# Altium PCB Some.PcbDoc
Units mil, origin at the board's own origin, x right, y up, seen from the top; angles counter-clockwise.
Board outline 1050 x 1745 mil, 2 copper layers (Top Layer, Bottom Layer); 10 components, 8 nets, 36 pads, 0 vias.
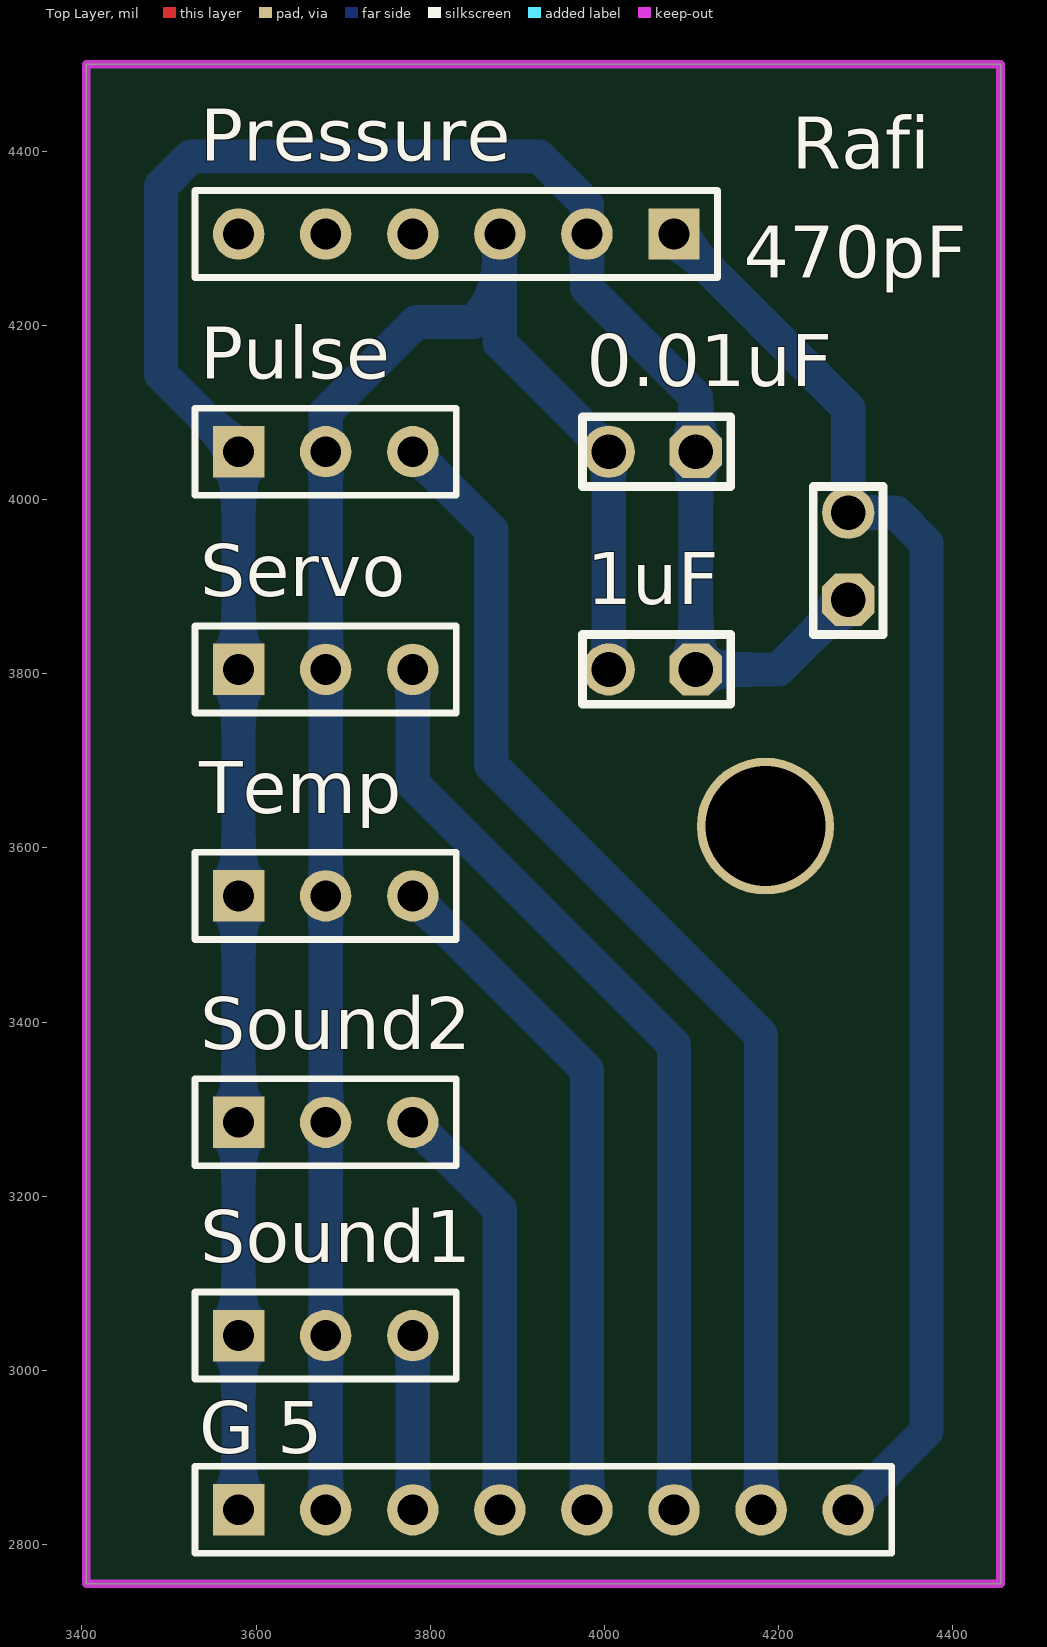
[diagram p0: Top Layer view]
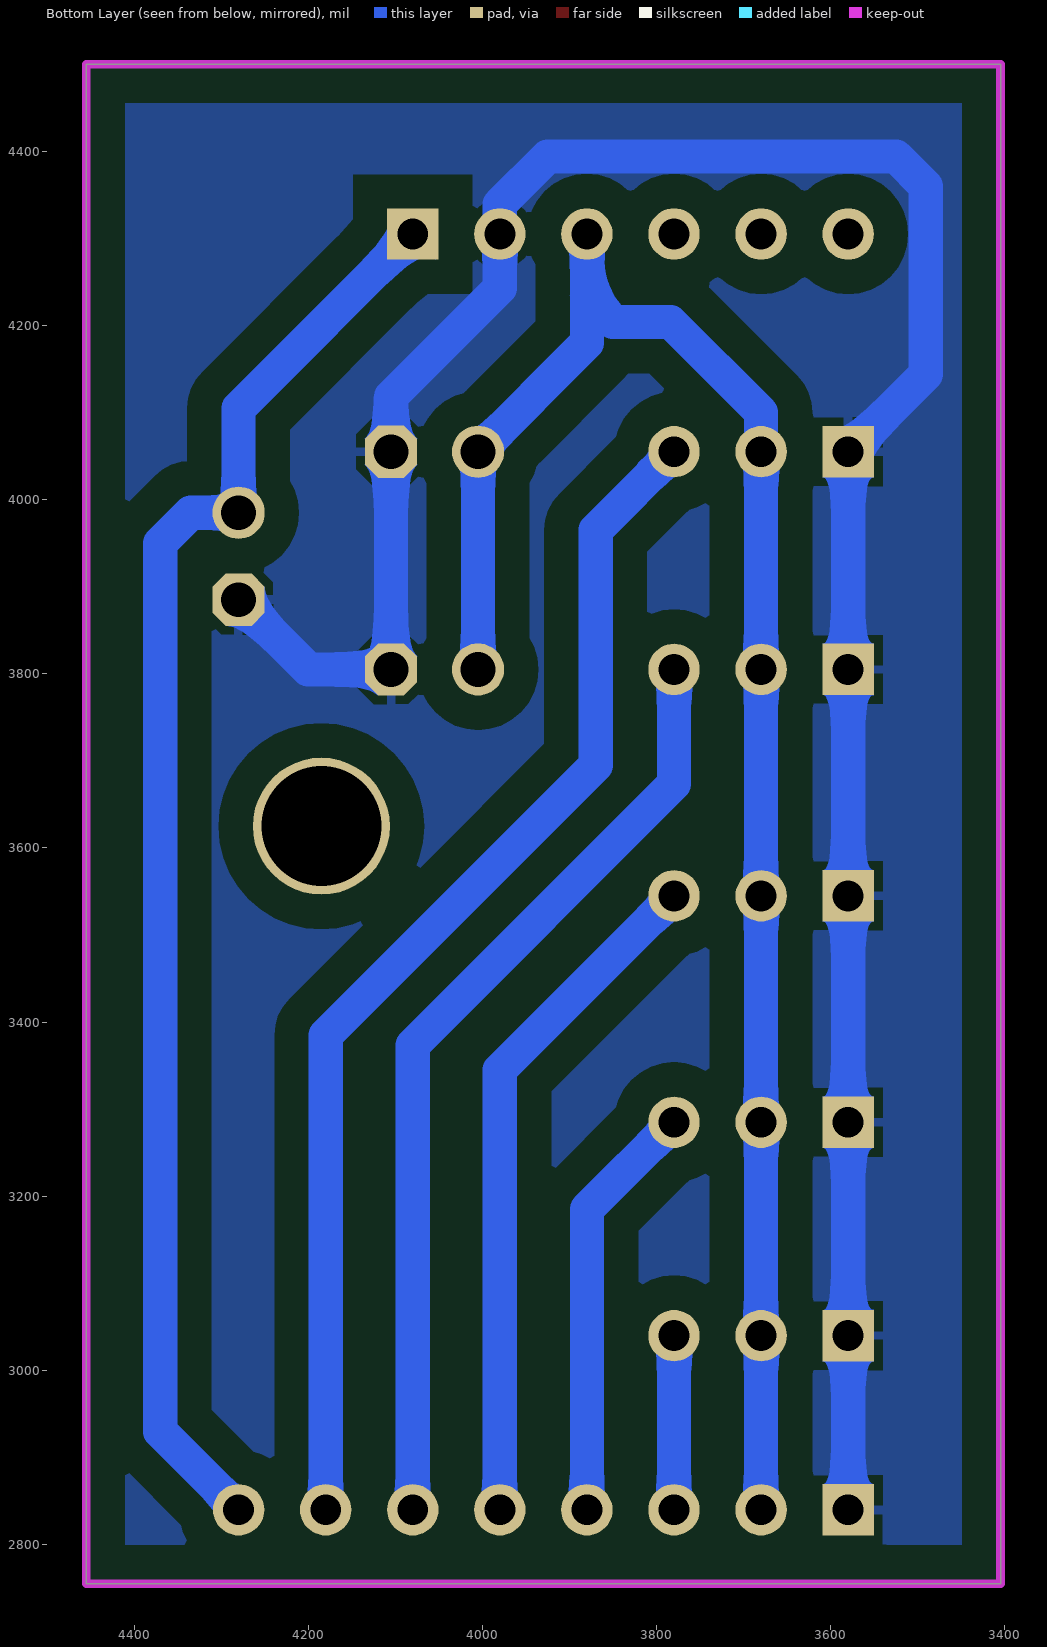
[diagram p1: Bottom Layer view, seen from below]

## Layer stack, top to bottom
Top Solder: solder mask 0.4, Solder Resist, Dk 3.5
Top Layer: signal copper 1.4
Dielectric 1: dielectric 12.6, FR-4, Dk 4.8
Bottom Layer: signal copper 1.4
Bottom Solder: solder mask 0.4, Solder Resist, Dk 3.5

## Board outline
3405,2755 4455,2755 4455,4500 3405,4500

## Design rules (kind name [scope] priority, off if disabled: settings)
Clearance [All] p1: gap=39.37
PolygonConnect [All] p1: connectstyle=Relief reliefconductorwidth=10 reliefentries=4 polygonreliefangle="90 Angle" airgapwidth=10
RoutingVias [All] p1: holewidth=28 width=50 viastyle="Through Hole" minholewidth=28 minwidth=50 maxholewidth=28 maxwidth=50
SolderMaskExpansion [All] p1: expansion=4
Width [All] p1: maxlimit=39.37 minlimit=39.37 preferedwidth=39.37
30 further rules are at their usual default settings.

## Components (designator, comment, footprint, x,y, rotation, side; value= is the part's Value field where it differs from the comment)
0.01uF "Cap" My_cap100n 4055,4055 r180 top
1uF "Cap" My_cap100n 4055,3805 r180 top
470pF "Cap" My_cap100n 4280,3935 r90 top
"G 5" "Header 8" HDR1X8 3580,2840 r0 top (schematic designator P?)
Pressure "Header 6" HDR1X6 4080,4305 r180 top
Pulse "" HDR1X3 3580,4055 r0 top
Servo "" HDR1X3 3580,3805 r0 top
Sound1 "" HDR1X3 3580,3040 r0 top
Sound2 "" HDR1X3 3580,3285 r0 top
Temp "" HDR1X3 3580,3545 r0 top (schematic designator Temperature)

## Footprints (in the part's own frame and the unit in brackets; to place one, negate y for a bottom-side part, rotate by r counter-clockwise, add the part's x,y. Pads: shape width x height; smd on the part's side, far side on the other; paste and mask are expansions set on the pad)
HDR1X3 [mm] "Connector; Header; 3 Position"
  rect 1.5x1.5 hole 0.9: 1(0,0)
  round 1.5 hole 0.9: 2(2.54,0) 3(5.08,0)
  silkscreen extent -1.27,-1.27 6.35,1.27
HDR1X6 [mm] "Connector; Header; 6 Position"
  rect 1.5x1.5 hole 0.9: 1(0,0)
  round 1.5 hole 0.9: 2(2.54,0) 3(5.08,0) 4(7.62,0) 5(10.16,0) 6(12.7,0)
  silkscreen extent -1.27,-1.27 13.97,1.27
HDR1X8 [mm] "Connector; Header; 8 Position"
  rect 1.5x1.5 hole 0.9: 1(0,0)
  round 1.5 hole 0.9: 2(2.54,0) 3(5.08,0) 4(7.62,0) 5(10.16,0) 6(12.7,0) 7(15.24,0) 8(17.78,0)
  silkscreen extent -1.27,-1.27 19.05,1.27
My_cap100n [mil]
  oct 60x60 hole 40: 1(-50,0)
  round 60 hole 40: 2(50,0)
  silkscreen extent -90,-40 80,40

## Part data
0.01uF 1uF 470pF: library part "Cap ceramic", "CAP-100Nf"
"G 5": "Header, 8-Pin"
Pressure: "Header, 6-Pin"
Pulse Servo Sound1 Sound2 Temp: library part "Header 3", "Header, 3-Pin"

## Free pads (board coordinates)
  round 157.48 hole 137.8: 3(4185,3625)

## Nets (pads, with @x,y where several pads share a name; then routed paths per layer and width w, separated by ;. In a path a pad name is that pad's centre, name@x,y a point inside that pad or via, vN(x,y) a via of type N, cw(c..) or ccw(c..) an arc to the next point about the centre after c; other vN are vias at no path point)
+5: 0.01uF.2 1uF.2 "G 5.2" Pressure.3 Pulse.2 Servo.2 Sound1.2 Sound2.2 Temp.2 | length 2067.3
  Bottom Layer w39.37: 3680,2840 Sound1.2 Sound2.2 Temp.2 Servo.2 Pulse.2 3680,4100 3784,4204 3850,4204 3880,4234 ; Pressure.3 3880,4234 ; 1uF.2 0.01uF.2 3880,4180 3880,4234
GND: 0.01uF.1 1uF.1 470pF.1 "G 5.1" Pressure.2 Pulse.1 Servo.1 Sound1.1 Sound2.1 Temp.1 | length 2876.6
  Bottom Layer w39.37: 3580,2840 Sound1.1 Sound2.1 Temp.1 Servo.1 Pulse.1 3491,4144 3491,4360 3525,4394 3925,4394 3980,4339 Pressure.2 3980,4243 4105,4118 0.01uF.1 1uF.1 4200,3805 470pF.1
Net470pF_2: 470pF.2 "G 5.8" Pressure.1 | length 1654.6
  Bottom Layer w39.37: Pressure.1 4280,4105 470pF.2 4335,3985 4370,3950 4370,2930 4280,2840
NetP?_3: "G 5.3" Sound1.3 | length 200
  Bottom Layer w39.37: 3780,2840 Sound1.3
NetP?_4: "G 5.4" Sound2.3 | length 486.4
  Bottom Layer w39.37: Sound2.3 3880,3185 3880,2840
NetP?_5: "G 5.5" Temp.3 | length 787.8
  Bottom Layer w39.37: Temp.3 3980,3345 3980,2840
NetP?_6: "G 5.6" Servo.3 | length 1089.3
  Bottom Layer w39.37: Servo.3 3780,3673.58 4080,3373.58 4080,2840
NetP?_7: "G 5.7" Pulse.3 | length 1380.7
  Bottom Layer w39.37: Pulse.3 3870,3965 3870,3694.94 4180,3384.94 4180,2840
pads on no net: Pressure.4 Pressure.5 Pressure.6

## Polygon pours and split planes (outlines as drawn)
GND on Bottom Layer "Bottom Layer-GND" (solid, pour order 3): 3405,2755 4455,2755 4455,4495 4450,4500 3405,4500 3405,2755

## Keep-outs
Keep-Out Layer:
  the board outline again, w10

## Silkscreen, mask and mechanical layers (free items; w line width, h text height)
Top Overlay:
  text "Rafi" at 4215,4380 h60